# Altium PCB Klok.PcbDoc
Units mil, origin at the board's own origin, x right, y up, seen from the top; angles counter-clockwise.
Board outline 6761 x 3700 mil, 2 copper layers (Top Layer, Bottom Layer); 93 components, 127 nets, 420 pads, 96 vias.
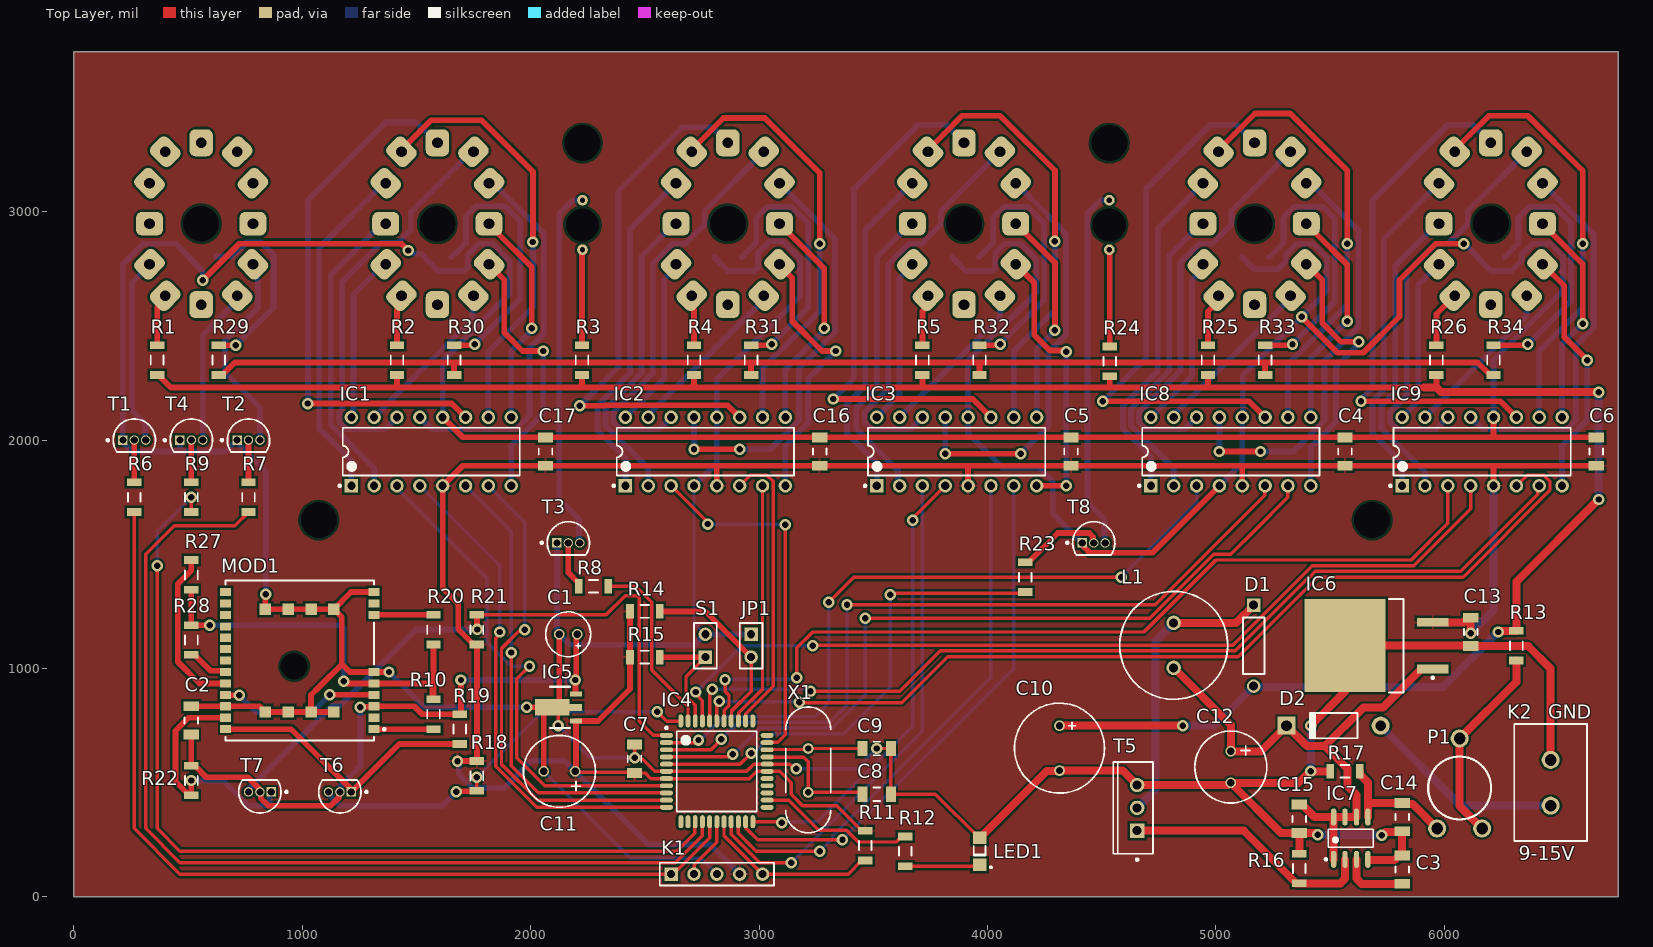
[diagram p0: Top Layer view]
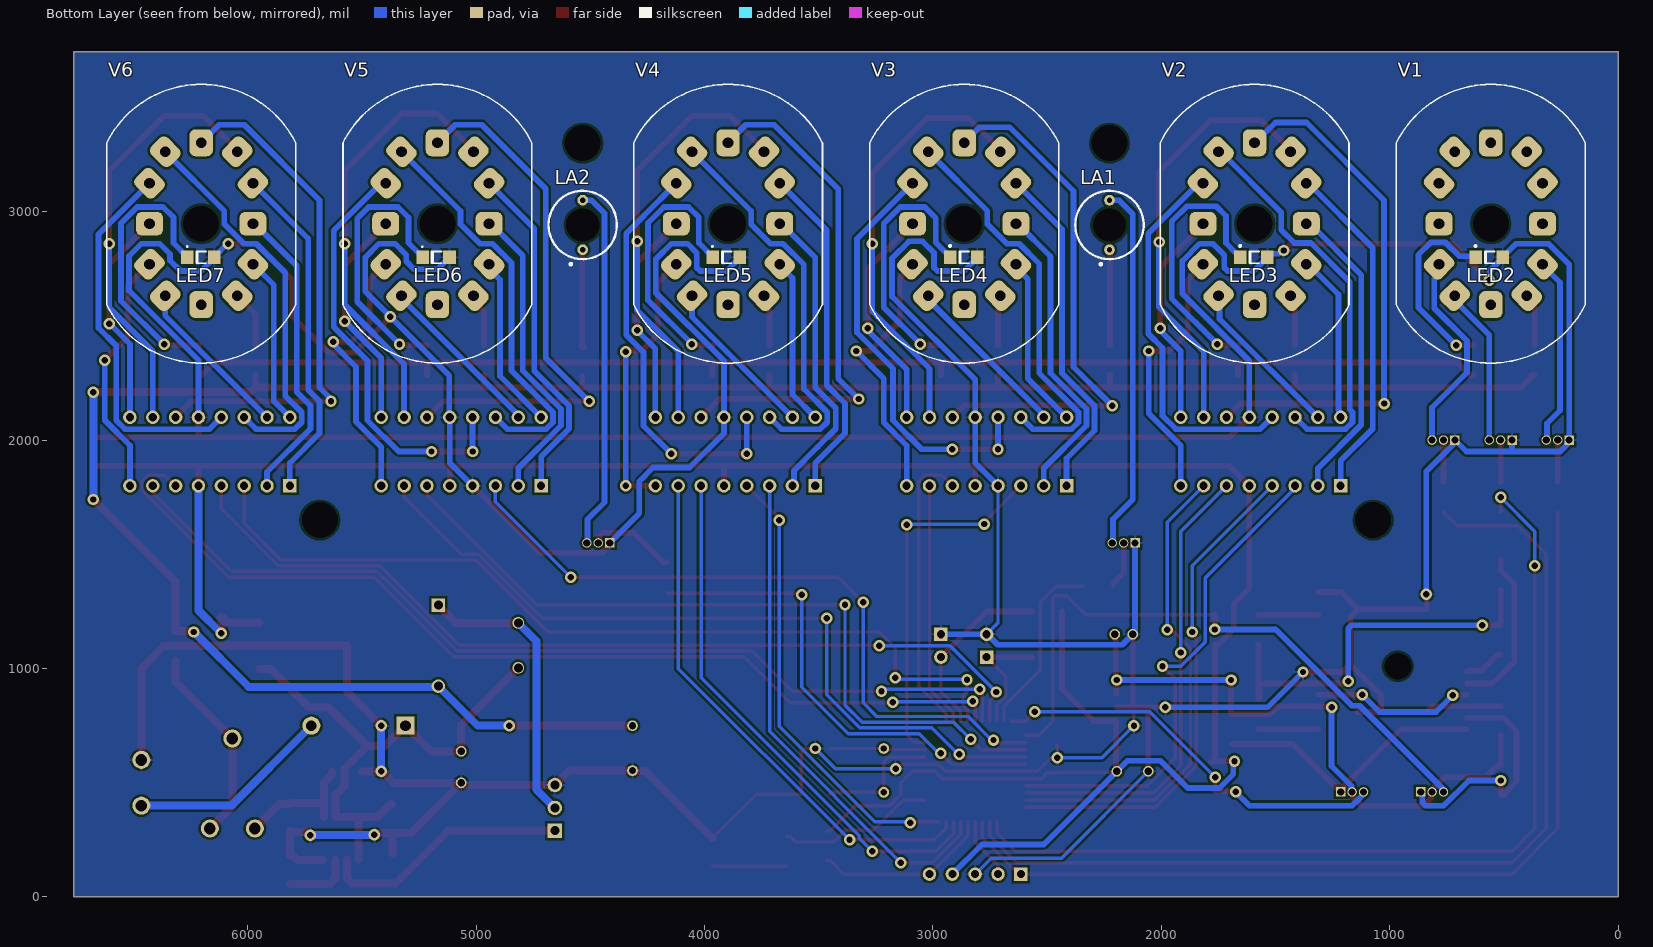
[diagram p1: Bottom Layer view, seen from below]

## Layer stack, top to bottom
Top Solder: solder mask 0.4, Solder Resist, Dk 3.5
Top Layer: signal copper 1.4
Dielectric 1: dielectric 12.6, FR-4, Dk 4.8
Bottom Layer: signal copper 1.4
Bottom Solder: solder mask 0.4, Solder Resist, Dk 3.5

## Board outline
0,0 6761,0 6761,3700 0,3700

## Design rules (kind name [scope] priority, off if disabled: settings)
Clearance [All] p1: gap=10 ignorepadtopadclearanceinfootprint=TRUE except(0: Arc-Hole Track-Hole SMDPad-Hole THPad-Hole Via-Hole Fill-Hole Poly-Hole Region-Hole Text-Hole)
HoleSize [All] p1: absolutevalues=TRUE maxlimit=200 minlimit=1 maxpercent=80.000 minpercent=20.000
MinimumSolderMaskSliver [All] p1: minsoldermaskwidth=0.5
PolygonConnect [All] p1: connectstyle=Relief reliefconductorwidth=10 reliefentries=4 polygonreliefangle="90 Angle" airgapwidth=10
RoutingVias [All] p1: holewidth=28 width=50 viastyle="Through Hole" minholewidth=28 minwidth=50 maxholewidth=28 maxwidth=50
SilkToSolderMaskClearance [IsPad] p1: minsilkscreentomaskgap=1 clearancetoexposedcopper=TRUE
SolderMaskExpansion [All] p1: expansion=4 istentingtop=FALSE
Width [All] p1: maxlimit=35 minlimit=15 preferedwidth=25 minimp=50.000000 maximp=50.000000 favimp=50.000000
27 further rules are at their usual default settings.

## Components (designator, comment, footprint, x,y, rotation, side; value= is the part's Value field where it differs from the comment)
C1 "Cap Pol1" ELCO2.2 2165,1150 r180 top value=2,2µF
C2 "Cap" 1206_Capacitor 515,772.87 r270 top value=100nF
C3 "Cap" 1206_Capacitor 5815,120 r270 top value=680pF
C4 "Cap" 1206_Capacitor 5565,1950 r270 top value=100nF
C5 "Cap" 1206_Capacitor 4365,1950 r270 top value=100nF
C6 "Cap" 1206_Capacitor 6665,1950 r270 top value=100nF
C7 "Cap" 1206_Capacitor 2455,605 r270 top value=100nF
C8 "Cap" 1206_Capacitor 3515,450 r180 top value=22pF
C9 "Cap" 1206_Capacitor 3515,650 r180 top value=22pF
C10 "Cap Pol1" ELCO10 4315,650 r270 top value=10µF
C11 "Cap Pol1" ELCO100 2195,550 r180 top value=1µF
C12 "Cap Pol1" ELCO100 5065,637.8 r270 top value=100µF
C13 "Cap" 1206_Capacitor 6115,1160 r90 top value=100nF
C14 "Cap" 1206_Capacitor 5815,350 r90 top value=100nF
C15 "Cap" 1206_Capacitor 5365,342.13 r90 top value=100nF
C16 "Cap" 1206_Capacitor 3265,1950 r270 top value=100nF
C17 "Cap" 1206_Capacitor 2065,1950 r270 top value=100nF
D1 "BYV26" Through_Hole 5165,1100 r270 top
D2 "1N4004" DO-41 5515,750 r180 top
IC1 "K155ID1" K155ID1 1565,1950 r90 top
IC2 "K155ID1" K155ID1 2765,1950 r90 top
IC3 "K155ID1" K155ID1 3865,1950 r90 top
IC4 "PIC18F4420" PIC18F4420 2815,550 r0 top
IC5 "AP2205-33Y-13" AP2205-33Y-13 2195,830 r90 top
IC6 "7805" 7805 5562.8,1100 r180 top
IC7 "MC34063" MC34063 5590,257.48 r90 top
IC8 "K155ID1" K155ID1 5065,1950 r90 top
IC9 "K155ID1" K155ID1 6165,1950 r90 top
JP1 "Header 2" HDR1X2 2965,1150 r270 top
K1 "Header 5" HDR1X5 2615,100 r0 top
K2 "Kroonsteen" KROONSTEEN 6465,600 r270 top
L1 "Inductor" Inductor 4815,1003.15 r90 top value=330µH
LA1 "Lamp Neon" Neon_Lamp 2227,3050 r270 bottom locked
LA2 "Lamp Neon" Neon_Lamp 4533,3050 r270 bottom locked
LED1 "LED0" 1206_LED 3965,200 r90 top
LED2 "LED0" 1206_LED 565,2800 r180 bottom
LED3 "LED0" 1206_LED 1595,2800 r180 bottom
LED4 "LED0" 1206_LED 2865,2800 r180 bottom
LED5 "LED0" 1206_LED 3905,2800 r180 bottom
LED6 "LED0" 1206_LED 5175,2800 r180 bottom
LED7 "LED0" 1206_LED 6205,2800 r180 bottom
MOD1 "A2235H" A2235H 963.82,1009.8 r180 top
P1 "RPot" Pot 5968.15,300 r0 top value=500K
R1 "Res2" 1206_Resistor 365,2350 r270 top value=27K
R2 "Res2" 1206_Resistor 1415,2350 r270 top value=27K
R3 "Res2" 1206_Resistor 2225,2350 r270 top value=470K
R4 "Res2" 1206_Resistor 2715,2350 r270 top value=27K
R5 "Res2" 1206_Resistor 3715,2350 r270 top value=27K
R6 "Res2" 1206_Resistor 265,1750 r90 top value=10K
R7 "Res2" 1206_Resistor 765,1750 r90 top value=10K
R8 "Res2" 1206_Resistor 2275,1360 r180 top value=3K3
R9 "Res2" 1206_Resistor 515,1750 r90 top value=10K
R10 "Res2" 1206_Resistor 1575,800 r90 top value=10K
R11 "Res2" 1206_Resistor 3465,225 r90 top value=10K
R12 "Res2" 1206_Resistor 3640,200 r90 top value=1K
R13 "Res2" 1206_Resistor 6315,1100 r90 top value=470K
R14 "Res2" 1206_Resistor 2500,1250 r0 top value=10K
R15 "Res2" 1206_Resistor 2500,1050 r0 top value=10K
R16 "Res2" 1206_Resistor 5365,125 r270 top value=150
R17 "Res2" 1206_Resistor 5565,550 r0 top value=5K6
R18 "Res2" 1206_Resistor 1765,530 r90 top value=10K
R19 "Res2" 1206_Resistor 1690,735 r90 top value=10K
R20 "Res2" 1206_Resistor 1575,1170 r270 top value=10K
R21 "Res2" 1206_Resistor 1765,1170 r270 top value=10K
R22 "Res2" 1206_Resistor 515,510 r90 top value=10K
R23 "Res2" 1206_Resistor 4165,1400 r90 top value=3K3
R24 "Res2" 1206_Resistor 4535,2345 r270 top value=470K
R25 "Res2" 1206_Resistor 4965,2350 r270 top value=27K
R26 "Res2" 1206_Resistor 5965,2350 r270 top value=27K
R27 "Res2" 1206_Resistor 515,1410 r270 top value=2,2K
R28 "Res2" 1206_Resistor 515,1125 r90 top value=2,2K
R29 "Res2" 1206_Resistor 635,2350 r90 top value=180
R30 "Res2" 1206_Resistor 1665,2350 r90 top value=180
R31 "Res2" 1206_Resistor 2965,2350 r90 top value=180
R32 "Res2" 1206_Resistor 3965,2350 r90 top value=180
R33 "Res2" 1206_Resistor 5215,2350 r90 top value=180
R34 "Res2" 1206_Resistor 6215,2350 r90 top value=180
S1 "Switch" HDR1X2 2765,1050 r90 top
T1 "MPSA42" MPSA42 265,2000 r0 top
T2 "MPSA42" MPSA42 765,2000 r0 top
T3 "MPSA42" MPSA42 2165,1550 r0 top
T4 "MPSA42" MPSA42 515,2000 r0 top
T5 "SPP20N60C3" SPP20N60C3 4655,390 r180 top
T6 "2N7000" 2N7000 1165,460 r180 top
T7 "2N7000" 2N7000 815,460 r180 top
T8 "MPSA42" MPSA42 4465,1550 r0 top
V1 "Nixie IN12" "Nixie IN12" 556,2950 r180 bottom locked
V2 "Nixie IN12" "Nixie IN12" 1590,2950 r180 bottom locked
V3 "Nixie IN12" "Nixie IN12" 2861,2950 r180 bottom locked
V4 "Nixie IN12" "Nixie IN12" 3895,2950 r180 bottom locked
V5 "Nixie IN12" "Nixie IN12" 5167,2950 r180 bottom locked
V6 "Nixie IN12" "Nixie IN12" 6201,2950 r180 bottom locked
X1 "22.1184MHz" "XTAL - duplicate" 3215,457.87 r90 top

## Footprints (in the part's own frame and the unit in brackets; to place one, negate y for a bottom-side part, rotate by r counter-clockwise, add the part's x,y. Pads: shape width x height; smd on the part's side, far side on the other; paste and mask are expansions set on the pad)
2N7000 [mm]
  rect 1.05x1.05 hole 0.8: 1(-1.27,0)
  round 1.05 hole 0.8: 2(0,0) 3(1.27,0)
  silkscreen extent -3.08,-1.34 2.35,2.35, body extent -2.35,-1.33 2.36,2.36, height 7.87
1206_Capacitor [mm]
  rect 1.1x1.7 smd: 1(-1.578,0) 2(1.578,0)
  silkscreen extent -0.35,-0.75 0.35,0.75, body extent -1.7,-0.9 1.7,0.9, height 1.52
1206_LED [mm]
  rect 1.4x1.5 smd: 1(-1.5,0) 2(1.5,0)
  silkscreen extent -0.5,-0.67 0.6,0.65, body extent -1.6,-0.8 1.6,0.8, height 0.68
1206_Resistor [mm]
  rect 0.85x1.6 smd: 1(-1.651,0) 2(1.651,0)
  silkscreen extent -0.5,-0.7 0.5,0.7, body extent -1.6,-0.85 1.6,0.85, height 0.65
7805 [mm]
  rect 3.5x0.95 smd: 1(-9.804,2.591) 3(-9.804,-2.591)
  rect 9x10.35 smd: 4(-0.056,0)
  silkscreen extent -9.93,-5.2 -4.96,5.2, body extent -6.56,-5.2 2.79,5.2, height 4.6
A2235H [mm]
  rect 1.2x0.9 smd: 1(-8.89,6.985) 2(-8.89,5.715) 3(-8.89,4.445) 4(-8.89,3.175) 5(-8.89,1.905) 6(-8.89,0.635) 7(-8.89,-5.715) 8(-8.89,-6.985) 9(-8.89,-8.255) 10(7.62,-8.255) 11(7.62,-6.985) 12(7.62,-5.715) 13(7.62,-4.445) 14(7.62,-3.175) 15(7.62,-1.905) 16(7.62,-0.635) 17(7.62,0.635) 18(7.62,1.905) 19(7.62,3.175) 20(7.62,4.445) 21(7.62,5.715) 22(7.62,6.985)
  rect 1.27x1.27 smd: 23(-4.445,5.08) 24(-1.905,5.08) 25(0.635,5.08) 26(3.175,5.08) 27(-4.445,-6.35) 28(-1.905,-6.35) 29(0.635,-6.35) 30(3.175,-6.35)
  round 2.7 hole 3 unplated: ""(-0.03,-0.005)
  silkscreen extent -10.16,-9.53 7.62,8.26, body extent -8.89,-9.52 7.62,8.25, height 7.11
AP2205-33Y-13 [mm]
  rect 0.55x1.3 smd: 1(-1.5,-0.088) 3(1.5,-0.088)
  rect 1.85x3.825 smd: 2(0,2.54)
  rect 0.8x1.475 smd: 2(0,0)
  silkscreen extent -2.3,0.6 2.3,2.8
DO-41 [mm] "Diode, Axial; Body 5.2 x 2.7 mm (LxDia. max), Lead Dia. 0.86 mm (max)"
  round 2 hole 1.2: 1(-5.23,0)
  rect 2x2 hole 1.2: 2(5.23,0)
  silkscreen extent -2.65,-1.4 2.75,1.4
ELCO2.2 [mm]
  round 1.2 hole 0.8: 1(-0.984,0) 2(1.016,0)
  silkscreen extent -2.48,-2.5 2.51,2.5
ELCO10 [mm]
  round 1.2 hole 0.8: 1(-2.54,0) 2(2.46,0)
  silkscreen extent -5.04,-5 4.96,5
ELCO100 [mm]
  round 1.2 hole 0.8: 1(0,0) 2(3.5,0)
  silkscreen extent -2.25,-4 5.75,4
HDR1X2 [mm] "Connector; Header; 2 Position"
  rect 1.5x1.5 hole 0.9: 1(0,0)
  round 1.5 hole 0.9: 2(2.54,0)
  silkscreen extent -1.27,-1.27 3.81,1.27
HDR1X5 [mm] "Connector; Header; 5 Position"
  rect 1.5x1.5 hole 0.9: 1(0,0)
  round 1.5 hole 0.9: 2(2.54,0) 3(5.08,0) 4(7.62,0) 5(10.16,0)
  silkscreen extent -1.27,-1.27 11.43,1.27
Inductor [mm]
  round 1.6 / inner round 1.2 / far side round 1.3 hole 1: 1(0,0) 2(5,0)
  silkscreen extent -3.5,-6 8.5,6
K155ID1 [mm]
  rect 1.5x1.5 hole 0.9: 1(-3.81,8.89)
  round 1.5 hole 0.9: 2(-3.81,6.35) 3(-3.81,3.81) 4(-3.81,1.27) 5(-3.81,-1.27) 6(-3.81,-3.81) 7(-3.81,-6.35) 8(-3.81,-8.89) 9(3.81,-8.89) 10(3.81,-6.35) 11(3.81,-3.81) 12(3.81,-1.27) 13(3.81,1.27) 14(3.81,3.81) 15(3.81,6.35) 16(3.81,8.89)
  silkscreen extent -3.93,-9.85 2.65,10.31, body extent -3.95,-9.85 3.95,9.85, height 5.08
KROONSTEEN [mm]
  round 2 / inner round 1.2 / far side round 2 hole 1.3: 1(0,0) 2(5.08,0)
  silkscreen extent -4,-4.05 9,4.05
MC34063 [mm]
  oval 1.9x0.6 smd: 1(-2.35,1.905) 2(-2.35,0.635) 3(-2.35,-0.635) 4(-2.35,-1.905) 5(2.35,-1.905) 6(2.35,-0.635) 7(2.35,0.635) 8(2.35,1.905)
  silkscreen extent -2.47,-2.5 1,2.88, body extent -2,-2.5 2,2.5, height 1.75
MPSA42 [mm]
  rect 1.05x1.05 hole 0.8: 1(-1.27,0)
  round 1.05 hole 0.8: 2(0,0) 3(1.27,0)
  silkscreen extent -3.07,-1.34 2.35,2.35, body extent -2.35,-1.33 2.36,2.36, height 7.87
Neon_Lamp [mm]
  round 1.2 hole 0.6: 1(0,0) 2(5.5,0)
  round 1.524 hole 3.7: 3(2.75,0)
  silkscreen extent -1.05,-3.8 6.55,3.8
"Nixie IN12" [mm]
  rrect50% 0x0 hole 4 unplated: 0(-0.05,-0.075)
  rrect50% 2.6x3 hole 1.2 rot 45: 1(3.95,-8.075) 2(5.7,-4.575) 7(-4.05,7.925) 8(-5.8,4.425)
  rrect50% 3x2.6 hole 1.2: 3(5.7,-0.075) 9(-5.8,-0.075)
  rrect50% 2.6x3 hole 1.2 rot 135: 4(5.7,4.425) 5(3.95,7.925) 10(-5.8,-4.575) 11(-4.05,-8.075)
  rrect50% 2.6x3 hole 1.2: 6(-0.05,8.925) 12(-0.05,-9.075)
  silkscreen extent -10.55,-15.58 10.45,15.42
PIC18F4420 [mm]
  oval 1.45x0.55 smd: 1(-5.6,4) 2(-5.6,3.2) 3(-5.6,2.4) 4(-5.6,1.6) 5(-5.6,0.8) 6(-5.6,0) 7(-5.6,-0.8) 8(-5.6,-1.6) 9(-5.6,-2.4) 10(-5.6,-3.2) 11(-5.6,-4) 23(5.6,-4) 24(5.6,-3.2) 25(5.6,-2.4) 26(5.6,-1.6) 27(5.6,-0.8) 28(5.6,0) 29(5.6,0.8) 30(5.6,1.6) 31(5.6,2.4) 32(5.6,3.2) 33(5.6,4)
  oval 0.55x1.45 smd: 12(-4,-5.6) 13(-3.2,-5.6) 14(-2.4,-5.6) 15(-1.6,-5.6) 16(-0.8,-5.6) 17(0,-5.6) 18(0.8,-5.6) 19(1.6,-5.6) 20(2.4,-5.6) 21(3.2,-5.6) 22(4,-5.6) 34(4,5.6) 35(3.2,5.6) 36(2.4,5.6) 37(1.6,5.6) 38(0.8,5.6) 39(0,5.6) 40(-0.8,5.6) 41(-1.6,5.6) 42(-2.4,5.6) 43(-3.2,5.6) 44(-4,5.6)
  silkscreen extent -5.72,-4.45 4.45,4.95, body extent -5,-5 5,5, height 1.2
Pot [mm]
  round 2 / inner round 1.2 / far side round 2 hole 1.3: 1(2.5,10) 2(0,0) 3(5,0)
  silkscreen extent -1,1 6,8
SPP20N60C3 [mm]
  rect 1.6x1.6 hole 1: 1(0,2.54)
  round 1.6 hole 1: 2(0,0) 3(0,-2.54)
  silkscreen extent -1.75,-5.1 2.65,5.87, body extent -1.75,-5.1 2.65,5.1, height 20.7
Through_Hole [mm]
  rect 1.5x1.5 hole 1: 1(-4.5,0)
  round 1.5 hole 1: 2(4.5,0)
  silkscreen extent -3.15,-1.2 3.15,1.2, body extent -3.15,-1.2 3.15,1.2, height 2.4
"XTAL - duplicate" [mm]
  round 1.2 hole 0.7: 1(0,0) 2(4.88,0)
  silkscreen extent -4.5,-2.5 9.5,2.5

## Part data
C1 C10 C11 C12: "Polarized Capacitor (Radial)", LatestRevisionDate=17-Jul-2002, LatestRevisionNote="Re-released for DXP Platform.", PackageDescription="Polarized Capacitor (Radial); 2 Leads", PackageReference=RB7.6-15, Published=8-Jun-2000, Publisher="Altium Limited"
C2 C3 C4 C5 C6 C7 C8 C9 C13 C14 C15 C16 C17: "Capacitor", LatestRevisionDate=17-Jul-2002, LatestRevisionNote="Re-released for DXP Platform.", PackageDescription="Radial Cap, Thru-Hole; 2 Leads; 0.3 in Pin Spacing", PackageReference=RAD-0.3, Published=8-Jun-2000, Publisher="Altium Limited"
D2: library part "Diode 1N4004", "1 Amp General Purpose Rectifier", Code_JEDEC=DO-204-AL, ComponentLink1Description="Manufacturer Link", ComponentLink1URL=http://www.fairchildsemi.com/, ComponentLink2Description=Datasheet, ComponentLink2URL=http://www.fairchildsemi.com/ds/1N%2F1N4001.pdf, DatasheetVersion=1998, LatestRevisionDate=17-Jul-2002, LatestRevisionNote="Re-released for DXP Platform.", PackageDescription="Diode, Axial; Body 5.2 x 2.7 mm (LxDia. max), Lead Dia. 0.86 mm (max)", PackageReference=DO-41, PackageVersion=Aug-1999, Published=8-Jun-2000, Publisher="Altium Limited"
JP1: "Header, 2-Pin", LatestRevisionDate=17-Jul-2002, LatestRevisionNote="Re-released for DXP Platform.", Publisher="Altium Limited"
K1: "Header, 5-Pin", LatestRevisionDate=17-Jul-2002, LatestRevisionNote="Re-released for DXP Platform.", Publisher="Altium Limited"
K2 S1: library part "Header 2", "Header, 2-Pin", LatestRevisionDate=17-Jul-2002, LatestRevisionNote="Re-released for DXP Platform.", Publisher="Altium Limited"
LA1 LA2: "Neon Lamp", LatestRevisionDate=17-Jul-2002, LatestRevisionNote="Re-released for DXP Platform.", PackageReference=PIN2, Published=24-Mar-1999, Publisher="Altium Limited"
LED1 LED2 LED3 LED4 LED5 LED6 LED7: "Typical INFRARED GaAs LED", LatestRevisionDate=08-Jul-2005, LatestRevisionNote="Mech Layer 1 removed.", PackageDescription="LED; 2 Leads", PackageReference=LED-0, Published=8-Jun-2000, Publisher="Altium Limited"
P1: "Potentiometer", LatestRevisionDate=17-Jul-2002, LatestRevisionNote="Re-released for DXP Platform.", PackageDescription="Variable Resistor, Thru-Hole; 3 Leads", PackageReference=VR5, Published=8-Jun-2000, Publisher="Altium Limited", Set Position=0.5, Sim Note="Enter the Resistance value and the set point into parameter fields."
R1 R2 R3 R4 R5 R6 R7 R8 R9 R10 R11 R12 R13 R14 R15 R16 R17 R18 R19 R20 R21 R22 R23 R24 R25 R26 R27 R28 R29 R30 R31 R32 R33 R34: "Resistor", LatestRevisionDate=17-Jul-2002, LatestRevisionNote="Re-released for DXP Platform.", PackageDescription="Axial Device, Thru-Hole; 2 Leads; 0.4 in Pin Spacing", PackageReference=AXIAL-0.4, Published=8-Jun-2000, Publisher="Altium Limited"
X1: library part XTAL, "Crystal Oscillator", LatestRevisionDate=17-Jul-2002, LatestRevisionNote="Re-released for DXP Platform.", PackageDescription="Crystal, Thru-Hole; 2 Leads; Body 3.1 x 8.2 mm (Dia.xH)", PackageReference=R38, Published=8-Jun-2000, Publisher="Altium Limited"
L1: Code_IEC=1005, Code_JEITA=0402, LatestRevisionDate=29-May-2009, LatestRevisionNote="IPC-7351 Footprint Added.", PackageDescription="Chip Inductor", PackageReference=0402-A, Published=8-Jun-2000, Publisher="Altium Limited"

## Free pads (board coordinates)
  round 60 hole 157.48 unplated: 4(1073,1650) 4(2227,3300) 4(4533,3300) 4(5684,1650)

## Via types
v1: diameter 50, hole 28, Top Layer to Bottom Layer, 96 vias

## Nets (pads, with @x,y where several pads share a name; then routed paths per layer and width w, separated by ;. In a path a pad name is that pad's centre, name@x,y a point inside that pad or via, vN(x,y) a via of type N, cw(c..) or ccw(c..) an arc to the next point about the centre after c; other vN are vias at no path point)
+1.8V: MOD1.5 R10.2 R20.2 R27.2 R28.2 | length 1754.3
  Top Layer w25: R27.2 R28.2 v1(595,1190) ; v1(1182.47,944.64) 1189.23,944.64 1199.07,934.8 MOD1.5 ; MOD1.5@1319.72,934.8 1565.2,934.8 1570,930 1570,869.23 1574.23,865 R10.2 R20.2
  Bottom Layer w25: v1(595,1190) 1167.57,1190 1182.22,1175.36 1182.22,944.89 v1(1182.47,944.64)
+3,3V: C1.1 C2.2 IC5.3 MOD1.3 R19.2 R22.2 T6.2 T7.2 | length 2691.6
  Top Layer w25: C2.2 R22.2 529.76,575 580.44,524.32 761.73,524.32 811.87,474.18 811.87,463.13 818.13,456.87 818.13,433.72 851.84,400 1125,400 1161.87,436.87 1161.87,456.87 T6.2 ; v1(1255,830) 1257.4,832.4 1311.42,832.4 MOD1.3 1490.46,834.8 1525.27,800 R19.2 1695,805 v1(1695,950) ; IC5.3 2196.72,890.73 2196.72,948.28 v1(2195,950) 2199.48,954.48 2199.48,1145.74 C1.1
  Bottom Layer w25: T6.2 1168.13,463.13 1168.13,486.28 1255,573.16 v1(1255,830) ; v1(1695,950) v1(2195,950)
+3.3V: R29.1 R30.1 R31.1 R32.1 R33.1 R34.1 | length 5845.6
  Top Layer w25: R29.1 649.76,2285 704.76,2340 1665,2340 ; R30.1 1665,2340 ; R31.1 2965,2340 ; R32.1 3965,2340 ; R33.1 5215,2340 ; R34.1 6200.24,2285 6145.24,2340 5215,2340 ; 1665,2340 2965,2340 ; 2965,2340 3965,2340 ; 3965,2340 5215,2340
+5V: C4.2 C5.2 C6.2 C7.2 C11.1 C13.2 C16.2 C17.2 IC1.5 IC2.5 IC3.5 IC4.7 IC4.28 IC5.1 IC6.3 IC8.5 IC9.5 K1.4 R11.2 R14.1 R15.1 R18.2 R21.2 | length 11606.5
  Top Layer w15: C11.1 2198.56,546.44 2451.44,546.44 C7.2@2455.05,542.82 ; C7.2 C7.2@2455.05,542.82 ; IC4.7 2526.5,518.5 2502.18,542.82 C7.2@2455.05,542.82 ; IC4.7@2595.8,517.23 2957.23,517.23 2990,550 IC4.28 3090,550 3140,500 3140,450 3190,400 3340.24,400 3450.24,290 R11.2
  Top Layer w25: v1(1680,595) R18.2 R21.2 1750.24,1105 1683.76,1171.48 1683.76,1281.24 1615,1350 IC1.5 1702.87,1887.87 C17.2 2815,1887.87 ; R18.2@1770,595 1774.23,590.77 R18.2@1784,590.77 ; C11.1@2198.44,550 IC5.1 2199.39,770 2295,770 2435,910 R15.1 R14.1 ; IC2.5 2815,1887.87 ; IC3.5 3915,1887.87 ; IC8.5 5115,1887.87 ; IC9.5 6215,1887.87 ; C6.2 6215,1887.87 ; 2815,1887.87 C16.2 3915,1887.87 ; 3915,1887.87 C5.2 5115,1887.87 ; 5115,1887.87 C4.2 6215,1887.87
  Top Layer w35: IC6.3 6083.06,1202 6103.19,1222.13 C13.2 v1(6115,1154.53) ; C13.2@6115,1226.28 C13.2@6119.15,1222.13
  Bottom Layer w25: v1(1680,595) 1684.78,590.22 1684.78,538.04 1745.32,477.5 1884.78,477.5 2003.4,596.12 2148.88,596.12 C11.1 2515,230 2785,230 K1.4
  Bottom Layer w35: v1(6115,1154.53) 6215,1254.53 IC9.5
+180V: C10.1 D1.2 R1.2 R2.2 R3.2 R4.2 R5.2 R13.2 R24.2 R25.2 R26.2 | length 10105.3
  Top Layer w25: R1.2 379.76,2285 384,2280.77 384,2271 425,2230 1415,2230 ; R2.2 1415,2230 ; R3.2 2225,2230 ; R4.2 2715,2230 ; R5.2 3715,2230 ; R24.2 4535,2230 ; R25.2 4965,2240 4975,2230 ; 5911.36,2230 4975,2230 ; 5965,2230 R26.2 ; 1415,2230 2225,2230 ; 2225,2230 2715,2230 ; 2715,2230 3715,2230 ; 3715,2230 4535,2230 ; 4535,2230 4965,2230 4975,2230
  Top Layer w35: C10.1 v1(4855,750) ; D1.2 5167.83,920 D1.2@5169.25,921.42 ; 5911.36,2230 5965,2230 5985,2210 v1(6675,2210) ; v1(6235,1160) 6239.06,1160 6244.06,1165 R13.2 6315,1380 v1(6675,1740)
  Bottom Layer w35: v1(4855,750) 4992.17,750 D1.2 5167.83,920 5995,920 v1(6235,1160) ; v1(6675,1740) v1(6675,2210)
GND: C1.2 C2.1 C3.1 C4.1 C5.1 C6.1 C7.1 C8.1 C9.1 C10.2 C11.2 C12.2 C13.1 C14.1 C15.1 C16.1 C17.1 IC1.12 IC2.4 IC2.12 IC3.12 IC4.6 IC4.29 IC5.2 IC6.4 IC7.4 IC8.4 IC8.12 IC9.12 JP1.1 K1.3 K2.1 LED1.2 LED2.2 LED3.2 LED4.2 LED5.2 LED6.2 LED7.2 MOD1.6 MOD1.9 MOD1.20 MOD1.23 MOD1.24 MOD1.25 MOD1.26 MOD1.27 MOD1.28 MOD1.29 MOD1.30 R16.1 R17.1 S1.2 T1.1 T2.1 T3.1 T4.1 T5.3 T8.1 | length 32496
  Top Layer w15: v1(2120,750) IC5.2@2120,830 ; C7.1 v1(2455,610) 2461.7,603.3 2490.18,603.3 2543.48,550 IC4.6 2945,550 2976.5,581.5 3133.5,581.5 3146.76,568.24 3156.86,568.24 v1(3163.56,561.55) ; v1(3514.95,650.05) 3515,650 C9.1 C8.1 3772.09,450 3963.03,259.06 LED1.2
  Top Layer w25: C2.1 515.1,834.9 663.72,834.9 663.82,835 813.62,835 MOD1.26 MOD1.25 MOD1.24 ; v1(565,2700) 724.73,2859.73 1435.27,2859.73 v1(1465,2830) ; v1(840,1325) 838.82,1323.82 MOD1.30 MOD1.29 MOD1.28 MOD1.27 ; MOD1.23 MOD1.24 ; MOD1.9 1213.82,1334.8 MOD1.27 ; v1(1380.2,984.8) MOD1.6 1207.83,984.8 1173.82,1018.82 ; IC1.12 1702.87,2012.13 C17.1 C16.1 C5.1 C4.1 6215,2012.13 ; v1(1982.5,830) IC5.2@2055,830 ; C11.2 2057.2,822.03 2060.65,825.47 2056.12,830 2095,830 2115,830 2125,840 C1.2 ; IC5.2@2120,830 IC5.2@2195,830 ; T8.1 4421.83,1543.17 4421.83,1532.12 4447.12,1506.83 4721.83,1506.83 IC8.4 ; v1(5375,2540) 5532.5,2382.5 5644.68,2382.5 5803.46,2541.28 5803.46,2700.95 5962.51,2860 v1(6085,2860) ; IC9.12 6215,2012.13 ; C6.1 6215,2012.13 ; MOD1.24 1038.82,883.82 1075,920 1173.82,1018.82 ; MOD1.27 1173.82,1224.8 1173.82,1018.82
  Top Layer w35: LED1.2 3966.97,259.06 4258.72,550.81 4312.66,550.81 C10.2 4591.85,553.15 T5.3 5051.69,490 5061.69,500 C12.2 ; R16.1 C15.1 ; v1(5415,750) 5565,900 IC6.4 6112.87,1100 C13.1 6367.13,1097.87 6465,1000 K2.1 ; v1(5445,272.13) 5437.13,280 C15.1 ; R17.1 v1(5415,550) 5410.94,550 5360.94,500 C12.2 ; IC7.4@5670.69,161.29 5782.35,161.29 5803.19,182.13 C3.1 C14.1 5810.85,283.72 5742.78,283.72 5729.06,270 v1(5725,270) ; C12.2 5285,280 C15.1
  Bottom Layer w15: C11.2 2437.2,170 2745,170 K1.3 ; v1(2120,750) 2260,610 v1(2455,610) ; IC2.4 2715,1200 S1.2 ; v1(3163.56,561.55) 3426.44,561.55 v1(3514.95,650.05)
  Bottom Layer w25: T4.1 465,1955.53 459.47,1950 ; v1(565,2700) 565,2738.98 505.94,2798.03 LED2.2 505.94,2801.97 448.18,2859.73 304.73,2859.73 215,2770 T1.1 221.83,1993.17 221.83,1982.12 253.95,1950 459.47,1950 ; v1(840,1325) 840,1863.95 721.83,1982.12 721.83,1993.17 T2.1 665,1950 459.47,1950 ; v1(1380.2,984.8) 1535,830 v1(1982.5,830) ; v1(1465,2830) 1471.76,2830 1485.45,2816.32 1520.89,2816.32 1535.94,2801.26 LED3.2 1595.94,2740 1710.36,2740 1725,2754.64 1725,2810 1775,2860 1832.43,2860 1908.2,2784.23 1908.2,2640.37 1615,2347.18 IC1.12 ; T3.1 2115,1166.02 2125,1156.02 C1.2 2171.12,1103.88 2716.33,1103.88 2762.45,1150 S1.2 JP1.1 ; IC2.4 2815,1900 IC2.12 2815,2264.63 3179.2,2628.82 3179.2,2795.8 3105,2870 3045,2870 2995,2820 2995,2754.64 2980.36,2740 2863.98,2740 2805.94,2798.03 LED4.2 ; LED5.2 3845.94,2798.03 3903.98,2740 4018.85,2740 4033.5,2754.64 4033.5,2818.5 4075,2860 4145,2860 4213.2,2791.8 4213.2,2645.37 3915,2347.18 IC3.12 3915,2030 4065,1880 4225,1880 4285,1820 4285,1680 T8.1 ; IC8.4 5115,1900 IC8.12 5117.4,2102.4 5117.4,2282.4 v1(5375,2540) 5485.2,2650.2 5485.2,2799.8 5425,2860 5355,2860 5305.5,2810.5 5305.5,2782.54 5270.93,2747.97 5197.18,2747.97 ; LED6.2 5115.94,2798.03 5131,2782.97 5132.97,2782.97 5167.94,2748.01 5197.14,2748.01 ; v1(6085,2860) 6087.91,2860 6145.94,2801.97 LED7.2 6145.94,2798.03 6203.98,2740 6292.96,2740 6339.5,2786.54 6339.5,2814.5 6385,2860 6465,2860 6519.2,2805.8 6519.2,2654.2 6215,2350 IC9.12
  Bottom Layer w35: v1(5415,550) v1(5415,750) ; v1(5445,272.13) 5446.06,271.06 5723.94,271.06 v1(5725,270)
NetC3_2: C3.2 IC7.3 | length 293.8
  Top Layer w35: IC7.3 5615,80.5 5637.63,57.87 C3.2
NetC8_2: C8.2 IC4.30 X1.1 | length 563.4
  Top Layer w15: IC4.30 3036.75,611.72 3195.13,611.72 3215,591.84 X1.1 3445,457.87 C8.2
NetC9_2: C9.2 IC4.31 X1.2 | length 419.7
  Top Layer w15: IC4.31 3036.75,645.76 3210.76,645.76 X1.2 C9.2
NetC12_1: C12.1 C15.2 D2.2 IC6.1 IC7.1 IC7.6 IC7.7 IC7.8 L1.1 | length 2399.2
  Top Layer w35: L1.1 5065,753.15 C12.1 5196.89,637.8 D2.2 5398.59,660.51 5476.61,660.51 ; C15.2 5376.81,404.25 5431.06,350 IC7.7 IC7.6 5615,446.01 5575,486.01 5575,562.12 5476.61,660.51 ; IC7.1 IC7.8@5515,347.82 ; IC6.1 5898.6,998 5730.6,830 5646.1,830 5476.61,660.51
NetC14_2: C14.2 IC7.5 P1.2 R17.2 | length 565
  Top Layer w35: R17.2 5630,536.77 5665,501.77 5665,410 ; IC7.5 5665,410 ; P1.2 5860.18,407.97 5819.15,407.97 C14.2 5667.13,412.13 5665,410
NetD1_1: D1.1 L1.2 T5.2 | length 1258.2
  Top Layer w35: L1.2 5087.83,1200 D1.1
  Bottom Layer w35: T5.2 4736.13,471.13 4736.13,1121.13 L1.2
NetD2_1: D2.1 K2.2 | length 889.1
  Bottom Layer w35: D2.1 6070.91,400 K2.2
NetIC1_1: IC1.1 V2.4 | length 1503.2
  Bottom Layer w25: IC1.1 1215,1910 1075,2050 1075,2842.17 V2.4@1360,3127.17
NetIC1_2: IC1.2 V2.3 | length 1330.7
  Bottom Layer w25: IC1.2 1315,1876.92 1125,2066.92 1125,2722.87 1352.13,2950 V2.3@1360,2950
NetIC1_3: IC1.3 IC4.8 | length 2206
  Top Layer w15: v1(1995,1010) 1940,955 1940,609.05 2062.04,487.01 IC4.8
  Bottom Layer w15: IC1.3 1415,1790 1808.59,1396.41 1808.59,1116.31 1914.9,1010 v1(1995,1010)
NetIC1_4: IC1.4 IC4.11 | length 2201.9
  Top Layer w15: v1(1864.95,1160.05) 1864.95,1150.58 1847.5,1133.13 1847.5,571.43 2026.41,392.52 IC4.11
  Bottom Layer w15: IC1.4 1864.95,1450.05 v1(1864.95,1160.05)
NetIC1_6: IC1.6 IC4.9 | length 2037.1
  Top Layer w15: v1(1915,1070) 1915,574.64 2034.13,455.51 IC4.9
  Bottom Layer w15: IC1.6 1915,1600 v1(1915,1070)
NetIC1_7: IC1.7 IC4.10 | length 2126.1
  Top Layer w15: v1(1975,1170) 1968.3,1163.3 1948.2,1163.3 1872.5,1087.6 1872.5,581.79 2030.27,424.02 IC4.10
  Bottom Layer w15: IC1.7 1975,1640 v1(1975,1170)
NetIC1_8: IC1.8 V2.10 | length 1183.9
  Top Layer w25: V2.10@1812.76,2772.83 1885,2700.59 1885,2470 1965,2390 v1(2055,2390)
  Bottom Layer w25: IC1.8 1915,1976.92 2055,2116.92 v1(2055,2390)
NetIC1_9: IC1.9 V2.9 | length 967.4
  Top Layer w25: V2.9@1812.76,2950 1813.55,2950 1851.23,2912.32 1851.23,2911.53 2005,2757.76 v1(2005,2490)
  Bottom Layer w25: IC1.9 1915,2390 2005,2480 v1(2005,2490)
NetIC1_10: IC1.10 V2.5 | length 1886.2
  Top Layer w25: V2.5@1428.9,3264.96 1518.29,3354.35 1518.29,3354.76 1546.46,3382.93 1546.87,3382.93 1563.94,3400 1785,3400 2010,3175 v1(2010,2867)
  Bottom Layer w25: IC1.10 1815,2387.23 2010,2582.23 v1(2010,2867)
NetIC1_11: IC1.11 V2.6 | length 2343
  Top Layer w25: v1(1025,2160) 1655,2160 IC1.11
  Bottom Layer w25: v1(1025,2160) 1025,3050 1365,3390 1500.71,3390 1547.9,3342.8 1548.69,3342.8 1586.38,3305.12 V2.6@1586.38,3304.33
NetIC1_13: IC1.13 V2.8 | length 1679.6
  Bottom Layer w25: IC1.13 1567.03,2047.97 1936.55,2047.97 1995,2106.42 1995,2402.82 2057.5,2465.32 2057.5,2904 1995,2966.5 1837.28,3124.21 V2.8
NetIC1_14: IC1.14 V2.7 | length 1755.5
  Bottom Layer w25: IC1.14 1362.97,2047.97 1193.45,2047.97 1162.97,2078.45 1162.97,2121.55 1175,2133.58 1175,2692.04 1345.65,2862.68 1417.68,2862.68 1475,2920 1475,2996.1 V2.7@1743.86,3264.96
NetIC1_15: IC1.15 V2.11 | length 713.8
  Bottom Layer w25: IC1.15 1745.19,2530.19 1745.19,2633.71 V2.11@1743.86,2635.04
NetIC1_16: IC1.16 V2.2 | length 732.9
  Bottom Layer w25: IC1.16 1221.52,2106.52 1221.52,2128.19 1225,2131.67 1225,2637.83 V2.2@1360,2772.83
NetIC2_1: IC2.1 V3.4 | length 1517.1
  Bottom Layer w25: IC2.1 2415,1920 2292.97,2042.03 2292.97,2150.55 2435,2292.57 2435,2922.62 V3.4
NetIC2_2: IC2.2 V3.3 | length 1357
  Bottom Layer w25: IC2.2 2515,1876.92 2327.97,2063.95 2327.97,2136.05 2485,2293.08 2485,2803.33 2628.72,2947.05 V3.3
NetIC2_3: IC2.3 IC4.32 | length 1588.4
  Top Layer w15: IC2.3 2775,1640 v1(2775,1632.5) ; IC4.32 3036.75,677.26 3082.26,677.26 3115,710 v1(3115,1630)
  Bottom Layer w15: v1(2775,1632.5) 2776.25,1631.25 3113.75,1631.25 v1(3115,1630)
NetIC2_6: IC2.6 IC4.35 | length 1277.1
  Top Layer w15: IC2.6 2962.03,1847.03 3034.48,1847.03 3062.03,1819.48 3062.03,921.67 2942.26,801.9 2942.26,771.75 IC4.35
NetIC2_7: IC2.7 IC4.36 | length 1073.2
  Top Layer w15: IC4.36 2910.76,771.75 2910.76,805.76 3015,910 IC2.7
NetIC2_8: IC2.8 V3.10 | length 1197.9
  Top Layer w25: V3.10 3089.35,2765.35 3145,2709.7 3145,2520 3275,2390 v1(3335,2390)
  Bottom Layer w25: IC2.8 3115,1976.92 3215,2076.92 3215,2270 v1(3335,2390)
NetIC2_9: IC2.9 V3.9 | length 999
  Top Layer w25: V3.9 3090.14,2947.05 3127.82,2909.36 3127.82,2908.57 3285,2751.39 v1(3285,2490)
  Bottom Layer w25: IC2.9 3115,2310 3285,2480 v1(3285,2490)
NetIC2_10: IC2.10 V3.5 | length 1899
  Top Layer w25: V3.5 2705.49,3270.49 2774.8,3339.8 2774.8,3340.27 2844.53,3410 3025,3410 3265,3170 v1(3265,2860)
  Bottom Layer w25: IC2.10 3015,2312.82 3265,2562.82 v1(3265,2860)
NetIC2_11: IC2.11 V3.6 | length 2355.6
  Top Layer w25: v1(2215,2150) 2325,2150 2327.03,2152.03 2862.97,2152.03 IC2.11
  Bottom Layer w25: v1(2215,2150) 2385,2320 2385,3090 2665,3370 2795.14,3370 2862.97,3302.17 V3.6
NetIC2_13: IC2.13 V3.8 | length 1856.1
  Top Layer w25: v1(2715,1960) v1(2915,1960)
  Bottom Layer w25: v1(2715,1960) IC2.13 ; v1(2915,1960) 3048.58,1960 3175,2086.42 3175,2312.82 3332.5,2470.32 3332.5,2881.06 V3.8
NetIC2_14: IC2.14 V3.7 | length 1773.8
  Bottom Layer w25: IC2.14 2562.97,2047.97 2393.45,2047.97 2362.97,2078.45 2362.97,2121.55 2535,2293.58 2535,2772.49 2622.24,2859.73 2676.34,2859.73 2761.73,2945.12 2761.73,3003.29 V3.7
NetIC2_15: IC2.15 V3.11 | length 741.5
  Bottom Layer w25: IC2.15 2515,2109.22 3020.45,2614.66 V3.11
NetIC2_16: IC2.16 V3.2 | length 761.7
  Bottom Layer w25: IC2.16 2585,2270 2585,2705.63 2636.59,2757.22 V3.2
NetIC3_1: IC3.1 V4.4 | length 1496.4
  Bottom Layer w25: IC3.1 3515,1900 3385,2030 3385,2160 3465,2240 3465,2918.62 V4.4
NetIC3_2: IC3.2 V4.3 | length 1332.1
  Bottom Layer w25: IC3.2 3608.48,1806.52 3608.48,1865.73 3505,1969.22 3505,1970 3425,2050 3425,2140 3515,2230 3515,2799.33 3662.72,2947.05 V4.3
NetIC3_3: IC3.3 IC4.19 | length 2256.7
  Top Layer w15: IC4.19 2877.99,274.62 3002.62,150 v1(3140,150)
  Bottom Layer w15: v1(3140,150) 3715,725 IC3.3
NetIC3_4: IC3.4 IC4.22 | length 1988.5
  Top Layer w15: IC4.22 3094.53,329.53 3099.11,324.95 v1(3100.05,324.95) ; v1(3672.5,1650) 3672.5,1657.5 IC3.4
  Bottom Layer w15: v1(3100.05,324.95) 3105.1,330 3255,330 3672.5,747.5 v1(3672.5,1650)
NetIC3_6: IC3.6 IC4.20 | length 2349.7
  Top Layer w15: IC4.20 2909.49,278.48 2987.97,200 v1(3265,200)
  Bottom Layer w15: v1(3265,200) 3322.5,257.5 3322.5,267.6 4015,960.1 IC3.6
NetIC3_7: IC3.7 IC4.21 | length 2333
  Top Layer w15: IC4.21 2942.26,328.25 2942.26,301.97 2994.23,250 v1(3365,250)
  Bottom Layer w15: v1(3365,250) 4115,1000 IC3.7
NetIC3_8: IC3.8 V4.10 | length 1231.2
  Top Layer w25: V4.10 4204.62,2688.6 4204.62,2460.38 4272.72,2392.28 4340.22,2392.28 v1(4345,2387.5) ; IC3.8 v1(4345,1800)
  Bottom Layer w25: v1(4345,1800) v1(4345,2387.5)
NetIC3_9: IC3.9 V4.9 | length 951.7
  Top Layer w25: V4.9 4124.14,2947.05 4295,2776.18 v1(4295,2480)
  Bottom Layer w25: IC3.9 4215,2400 v1(4295,2480)
NetIC3_10: IC3.10 V4.5 | length 1880.2
  Top Layer w25: V4.5 3739.49,3270.96 3808.8,3340.27 3888.53,3420 4055,3420 4295,3180 v1(4295,2870)
  Bottom Layer w25: IC3.10 4115,2389.61 4295,2569.61 v1(4295,2870)
NetIC3_11: IC3.11 V4.6 | length 2311.4
  Top Layer w25: v1(3325,2180) 3935,2180 IC3.11
  Bottom Layer w25: v1(3325,2180) 3415,2270 3415,3100 3695,3380 3819.14,3380 3896.97,3302.17 V4.6
NetIC3_13: IC3.13 V4.8 | length 1846.8
  Top Layer w25: v1(3815,1940) v1(4145,1940)
  Bottom Layer w25: v1(3815,1940) IC3.13 ; V4.8 4267.03,2980.53 4267.03,2979.93 4342.5,2904.46 4342.5,2460.32 4267.03,2384.85 4267.03,2062.03 v1(4145,1940)
NetIC3_14: IC3.14 V4.7 | length 1746.4
  Bottom Layer w25: IC3.14 3662.97,2047.97 3493.45,2047.97 3462.97,2078.45 3462.97,2121.55 3565,2223.58 3565,2768.49 3656.24,2859.73 3710.34,2859.73 3795.73,2945.12 3795.73,3003.29 V4.7
NetIC3_15: IC3.15 V4.11 | length 714.6
  Bottom Layer w25: IC3.15 4054.45,2539.45 4054.45,2566.25 4055.01,2566.81 4055.01,2631.53 V4.11
NetIC3_16: IC3.16 V4.2 | length 734.3
  Bottom Layer w25: IC3.16 3615,2200 3615,2709.63 3670.59,2765.22 V4.2
NetIC4_1: IC4.1 R21.1 T7.3 | length 2800.2
  Top Layer w15: R21.1 2330,1235 2413.79,1318.79 2466.21,1318.79 2475,1310 2475,770 2537.52,707.48 IC4.1
  Top Layer w25: R21.1 1765.54,1234.46 1765.54,1171.63 v1(1766.09,1171.09)
  Bottom Layer w25: T7.3 768.13,463.13 768.13,474.18 1131.25,837.3 1165.52,837.3 1499.31,1171.09 v1(1766.09,1171.09)
NetIC4_2: IC4.2 IC8.3 | length 3086.1
  Top Layer w15: IC4.2 2726.21,675.98 2735,684.77 v1(2735,686.99) ; v1(3305,1290) 3415,1400 v1(4585,1400)
  Bottom Layer w15: v1(2735,686.99) 2741.99,686.99 2845,790 3245,790 3305,850 v1(3305,1290) ; v1(4585,1400) 4915,1730 IC8.3
NetIC4_3: IC4.3 IC8.6 | length 3380.3
  Top Layer w15: IC4.3 2789.49,644.49 v1(2835,690) ; v1(3385,1280) 4734.29,1280 5085.69,1631.41 5086.41,1631.41 5213.21,1758.21 5213.21,1798.21 IC8.6
  Bottom Layer w15: v1(2835,690) 2910,765 3310,765 3385,840 v1(3385,1280)
NetIC4_4: IC4.4 IC8.7 | length 3439.2
  Top Layer w15: IC4.4 2876.21,612.99 2885,621.78 v1(2885,624) ; v1(3465,1220) 4709.64,1220 4989.64,1500 5065,1500 5171.41,1606.41 5315,1750 IC8.7
  Bottom Layer w15: v1(2885,624) 2889,624 3005,740 3320.36,740 3465,884.64 v1(3465,1220)
NetIC4_5: IC4.5 R23.1 | length 2120.1
  Top Layer w15: IC4.5 2916.5,581.5 v1(2965,630) ; v1(3575,1322.5) 3582.5,1330 3583.75,1328.75 4158.75,1328.75 R23.1
  Bottom Layer w15: v1(2965,630) 2975,630 3060,715 3371.21,715 3575,918.79 v1(3575,1322.5)
NetIC4_14: IC4.14 R9.1 | length 4068.2
  Top Layer w15: v1(365,1450) 365,300 465,200 2640,200 2719.24,279.24 2719.24,328.25 IC4.14 ; R9.1@506.7,1693.3 R9.1 v1(515,1750)
  Bottom Layer w15: v1(365,1450) 365,1600 v1(515,1750)
NetIC4_15: IC4.15 R7.1 | length 4335.8
  Top Layer w15: R7.1 705,1625 440,1625 315,1500 315,300 465,150 2633.32,150 2750.73,267.41 2750.73,328.25 IC4.15
NetIC4_16: IC4.16 K1.1 R6.1 | length 4123
  Top Layer w15: R6.1 265,300 465,100 K1.1 2637.03,122.03 2647.03,122.03 2783.5,258.5 IC4.16
NetIC4_17: IC4.17 K1.2 | length 270.9
  Top Layer w15: K1.2 2716.79,101.79 2716.79,141.79 2815,240 IC4.17
NetIC4_18: IC4.18 K1.5 R11.1 | length 780.2
  Top Layer w15: IC4.18 2846.5,268.5 K1.5 ; K1.5@3008.93,100 3390.24,100 3450.24,160 R11.1
NetIC4_24: IC4.24 R12.2 | length 690.5
  Top Layer w15: IC4.24 3130.63,424.02 3262.14,292.5 3382.6,292.5 3434.34,240.77 3601,240.77 3625.24,265 R12.2
NetIC4_37: IC4.37 JP1.2 R14.2 | length 798.4
  Top Layer w15: IC4.37 2879.27,771.75 2879.27,814.27 2965,900 JP1.2
  Top Layer w25: R14.2 2765,1250 JP1.2
NetIC4_38: IC4.38 IC9.3 | length 3885.5
  Top Layer w15: IC4.38 2847.77,771.75 2847.77,818.12 2867.26,837.61 2867.26,838.32 2868.5,839.57 2868.5,882.08 2851,899.58 v1(2851,951.56) ; v1(3164.95,960.05) 3165,960.1 3165,1090.1 3234.9,1160 4685,1160 5000,1475 5854.64,1475 6015,1635.36 IC9.3
  Bottom Layer w15: v1(2851,951.56) 2851.95,952.5 3157.4,952.5 v1(3164.95,960.05)
NetIC4_39: IC4.39 IC9.6 | length 4331.6
  Top Layer w15: IC4.39 2815,840 2826,851 v1(2826,856.46) ; v1(3175.05,852.5) 3177.55,850 3624.18,850 3826.33,1052.15 5097.15,1052.15 5445,1400 6081.51,1400 6462.03,1780.52 6462.03,1819.48 6434.48,1847.03 6362.03,1847.03 IC9.6
  Bottom Layer w15: v1(2826,856.46) 2827.99,854.48 3173.07,854.48 v1(3175.05,852.5)
NetIC4_40: IC4.40 IC9.7 | length 4158.5
  Top Layer w15: IC4.40 2783.5,888.68 2794.41,899.59 v1(2794.41,909.06) ; v1(3225.05,899.95) 3614.95,899.95 3792.15,1077.15 5084.14,1077.15 5406.99,1400 5409.64,1400 5434.64,1425 6071.15,1425 6408.79,1762.64 6408.79,1793.79 IC9.7
  Bottom Layer w15: v1(2794.41,909.06) 3215.94,909.06 v1(3225.05,899.95)
NetIC4_41: IC4.41 IC9.4 | length 3964
  Top Layer w15: v1(2722.5,897.25) 2722.5,889.09 2752.01,859.58 IC4.41 ; v1(3235,1100) 3237.15,1102.15 5073.78,1102.15 5421.64,1450 5865,1450 6115,1700 IC9.4
  Bottom Layer w15: v1(2722.5,897.25) 2925.25,1100 v1(3235,1100)
NetIC4_42: IC4.42 R15.2 S1.1 | length 531.5
  Top Layer w15: IC4.42 2720.51,839.13 2680,879.64 2680,965 S1.1
  Top Layer w25: R15.2 S1.1
NetIC4_43: IC4.43 R8.1 | length 804.6
  Top Layer w15: R8.1 2460.36,1360 2530.77,1289.59 2530.77,993.52 2689.02,835.27 IC4.43
NetIC4_44: IC4.44 R18.1 T6.3 | length 1795.6
  Top Layer w15: R18.1 v1(1765,525) ; v1(2555,810) 2595,770 2654.45,770 2654.92,770.47 IC4.44
  Top Layer w25: v1(1675,460) 1677.5,462.5 1762.5,462.5 R18.1
  Bottom Layer w15: v1(1765,525) 2050,810 v1(2555,810)
  Bottom Layer w25: T6.3 1118.13,456.87 1118.13,445.82 1147.12,416.83 1148.17,416.83 1165,400 1615,400 v1(1675,460)
NetIC7_2: IC7.2 R16.2 T5.1 | length 1098.2
  Top Layer w35: T5.1 5121.77,290 5351.77,60 5544.5,60 5565,80.5 IC7.2
NetIC8_1: IC8.1 V5.4 | length 1519.6
  Bottom Layer w25: IC8.1 4715,1927.43 4592.97,2049.45 4592.97,2150.55 4745,2302.57 4745,2926.62 V5.4
NetIC8_2: IC8.2 V5.3 | length 1359.4
  Bottom Layer w25: IC8.2 4815,1876.92 4627.97,2063.95 4627.97,2136.05 4795,2303.08 4795,2807.33 4934.72,2947.05 V5.3
NetIC8_8: IC8.8 V5.10 | length 1197.6
  Top Layer w25: V5.10 5465,2700.23 5465,2512.18 5547.18,2430 v1(5625,2430)
  Bottom Layer w25: IC8.8 5415,1970 5525,2080 5525,2320 5625,2420 v1(5625,2430)
NetIC8_9: IC8.9 V5.9 | length 988.2
  Top Layer w25: V5.9 5396.14,2947.05 5433.82,2909.36 5433.82,2908.57 5575,2767.39 v1(5575,2520)
  Bottom Layer w25: IC8.9 5415,2360 v1(5575,2520)
NetIC8_10: IC8.10 V5.5 | length 1929.6
  Top Layer w25: V5.5 5011.49,3270.96 5080.8,3340.27 5170.53,3430 5325,3430 5575,3180 v1(5575,2860)
  Bottom Layer w25: IC8.10 5315,2332.82 5575,2592.82 v1(5575,2860)
NetIC8_11: IC8.11 V5.6 | length 2370.7
  Top Layer w25: v1(4505,2170) 5145,2170 IC8.11
  Bottom Layer w25: v1(4505,2170) 4695,2360 4695,3100 4975,3380 5091.14,3380 5168.97,3302.17 V5.6
NetIC8_13: IC8.13 V5.8 | length 1871.4
  Top Layer w25: v1(5015,1950) v1(5195,1950)
  Bottom Layer w25: v1(5015,1950) IC8.13 ; v1(5195,1950) 5338.58,1950 5475,2086.42 5475,2347.18 5622.5,2494.68 5622.5,2917.35 5415.64,3124.21 V5.8
NetIC8_14: IC8.14 V5.7 | length 1776.3
  Bottom Layer w25: IC8.14 4862.97,2047.97 4693.45,2047.97 4662.97,2078.45 4662.97,2121.55 4845,2303.58 4845,2776.49 4928.24,2859.73 4982.34,2859.73 5067.73,2945.12 5067.73,3003.29 V5.7
NetIC8_15: IC8.15 V5.11 | length 743.9
  Bottom Layer w25: IC8.15 4815,2109.22 5326.45,2620.66 V5.11
NetIC8_16: IC8.16 V5.2 | length 764.2
  Bottom Layer w25: IC8.16 4895,2280 4895,2701.63 4942.59,2749.22 V5.2
NetIC9_1: IC9.1 V6.4 | length 1498.8
  Bottom Layer w25: IC9.1 5815,1900 5685,2030 5685,2170 5735,2220 5735,2882.62 V6.4
NetIC9_2: IC9.2 V6.3 | length 1334.6
  Bottom Layer w25: IC9.2 5915,1860 5725,2050 5725,2150 5785,2210 5785,2763.33 5968.72,2947.05 V6.3
NetIC9_8: IC9.8 V6.10 | length 1096.5
  Top Layer w25: V6.10 6525,2674.23 6525,2450 v1(6625,2350)
  Bottom Layer w25: IC9.8 6515,1976.92 6625,2086.92 v1(6625,2350)
NetIC9_9: IC9.9 V6.9 | length 957.5
  Top Layer w25: V6.9 6430.14,2947.05 6467.82,2909.36 6467.82,2908.57 6605,2771.39 v1(6605,2510)
  Bottom Layer w25: IC9.9 6515,2420 v1(6605,2510)
NetIC9_10: IC9.10 V6.5 | length 1888.3
  Top Layer w25: V6.5 6045.49,3270.49 6112.68,3337.68 6112.68,3338.15 6194.53,3420 6365,3420 6605,3180 v1(6605,2860)
  Bottom Layer w25: IC9.10 6415,2389.61 6605,2579.61 v1(6605,2860)
NetIC9_11: IC9.11 V6.6 | length 2297.4
  Top Layer w25: v1(5635,2170) 6245,2170 IC9.11
  Bottom Layer w25: v1(5635,2170) 5635,2176.76 5647.5,2189.26 5647.5,2192.5 5685,2230 5685,3050 6015,3380 6125.14,3380 6202.97,3302.17 V6.6
NetIC9_13: IC9.13 V6.8 | length 1659.8
  Bottom Layer w25: IC9.13 6167.03,2047.97 6536.55,2047.97 6575,2086.42 6575,2412.82 6652.5,2490.32 6652.5,2901.06 V6.8
NetIC9_14: IC9.14 V6.7 | length 1748.9
  Bottom Layer w25: IC9.14 5962.97,2047.97 5793.45,2047.97 5762.97,2078.45 5762.97,2121.55 5835,2193.58 5835,2732.49 5962.24,2859.73 6016.34,2859.73 6101.73,2945.12 6101.73,3003.29 V6.7
NetIC9_15: IC9.15 V6.11 | length 717.1
  Bottom Layer w25: IC9.15 6361.01,2546.01 6361.01,2631.53 V6.11
NetIC9_16: IC9.16 V6.2 | length 736.8
  Bottom Layer w25: IC9.16 5885,2170 5885,2678.29 V6.2
NetLA1_1: LA1.1 T3.3 | length 1602.1
  Bottom Layer w25: T3.3 2211.87,1553.13 2211.87,1653.13 2125,1740 2125,2990 2185,3050 LA1.1@2225,3050
NetLA1_2: LA1.2 R3.1 | length 418.5
  Top Layer w25: R3.1 LA1.2@2225,2833.46
NetLA2_1: LA2.1 T8.3 | length 1593.8
  Bottom Layer w25: T8.3 4511.87,1553.13 4511.87,1653.13 4437.67,1727.33 4437.67,2992.67 4495,3050 LA2.1
NetLA2_2: LA2.2 R24.1 | length 423.9
  Top Layer w25: R24.1@4534.5,2410.5 LA2.2@4534.5,2832.96
  Top Layer w35: LA2.2@4534,2833.46 LA2.2@4534.5,2832.96 ; R24.1@4534.5,2410.5 R24.1
NetLED1_1: LED1.1 R12.1 | length 327.5
  Top Layer w15: R12.1 3959.06,135 LED1.1
NetLED2_1: LED2.1 R29.2 | length 839.8
  Top Layer w25: R29.2 v1(710,2415)
  Bottom Layer w25: LED2.1 628.52,2804.47 695.47,2804.47 757,2866 820,2866 874.26,2811.74 874.26,2579.26 v1(710,2415)
NetLED3_1: LED3.1 R30.2 | length 1204.2
  Top Layer w25: R30.2 1743.24,2415 1748.24,2420 v1(1755,2420)
  Bottom Layer w25: LED3.1 1654.06,2801.97 1669.11,2817.03 1672.03,2817.03 1717.23,2862.23 1717.23,2981.54 1759.37,3023.68 1888.32,3023.68 1955,2957 1955,2620 v1(1755,2420)
NetLED4_1: LED4.1 R31.2 | length 1162.9
  Top Layer w25: R31.2 3050,2415 v1(3055,2420)
  Bottom Layer w25: LED4.1 2924.06,2801.97 2987.54,2865.45 2987.54,2972.3 3035.96,3020.73 3142.73,3020.73 3215,2948.46 3215,2580 v1(3055,2420)
NetLED5_1: LED5.1 R32.2 | length 1173.8
  Top Layer w25: R32.2 4050,2415 v1(4055,2420)
  Bottom Layer w25: LED5.1 3964.06,2801.97 4024.54,2862.45 4024.54,2975.3 4069.96,3020.73 4176.73,3020.73 4247.5,2949.96 4247.5,2850.32 4248.2,2849.63 4248.2,2613.2 v1(4055,2420)
NetLED6_1: LED6.1 R33.2 | length 1213.5
  Top Layer w25: R33.2 5330,2415 v1(5335,2420)
  Bottom Layer w25: LED6.1 5234.06,2801.97 5295.54,2863.45 5295.54,2974.3 5341.96,3020.73 5469.63,3020.73 5520.2,2970.16 5520.2,2605.2 v1(5335,2420)
NetLED7_1: LED7.1 R34.2 | length 1237.9
  Top Layer w25: R34.2 6360,2415 v1(6365,2420)
  Bottom Layer w25: LED7.1 6264.06,2801.97 6324.74,2862.66 6324.74,2975.1 6370.37,3020.73 6482.73,3020.73 6554.2,2949.26 6554.2,2609.2 v1(6365,2420)
NetMOD1_1: MOD1.1 R10.1 | length 261.3
  Top Layer w25: MOD1.1 1574.8,734.8 R10.1
NetMOD1_4: MOD1.4 MOD1.19 | length 712
  Top Layer w25: MOD1.19 664.97,883.65 723.85,883.65 v1(725,882.5) ; v1(1120.2,884.8) MOD1.4
  Bottom Layer w25: v1(725,882.5) 797.5,810 1045.39,810 v1(1120.2,884.8)
NetMOD1_7: MOD1.7 R20.1 | length 261.3
  Top Layer w25: MOD1.7 1313.92,1234.9 1574.9,1234.9 R20.1
NetMOD1_17: MOD1.17 R28.1 | length 180.6
  Top Layer w25: R28.1 529.76,1060 534,1055.77 534,1054.64 598.62,990.02 658.6,990.02 MOD1.17
NetMOD1_18: MOD1.18 R27.1 | length 718.1
  Top Layer w25: R27.1 515,1430 455,1370 455,1030 550.2,934.8 MOD1.18
NetMOD1_21: MOD1.21 R22.1 T7.1 | length 1070.8
  Top Layer w25: v1(515,510) R22.1 500.24,445 496,449.23 496,455.1 445,506.1 445,727.69 502.12,784.8 MOD1.21
  Bottom Layer w25: v1(515,510) 653.95,510 763.95,400 843.52,400 858.17,414.64 858.17,453.17 T7.1
NetMOD1_22: MOD1.22 R19.1 T6.1 | length 1233.5
  Top Layer w25: MOD1.22 951.25,734.8 1208.17,477.88 1208.17,466.83 T6.1 1425,670 R19.1
NetP1_1: P1.1 P1.3 R13.1 | length 878.7
  Top Layer w35: P1.3 6066.57,398.43 P1.1 6315,942.13 R13.1
NetR1_1: R1.1 V1.1 | length 231.8
  Top Layer w25: R1.1 365,2580 400.55,2615.55 V1.1@400.55,2632.09
NetR2_1: R2.1 V2.1 | length 225.8
  Top Layer w25: R2.1 1415,2569.32 1428.9,2583.22 V2.1@1428.9,2635.04
NetR4_1: R4.1 V3.1 | length 221.5
  Top Layer w25: V3.1 2704.93,2631.53 2704.93,2578.23 2715,2568.16 R4.1
NetR5_1: R5.1 V4.1 | length 227.2
  Top Layer w25: R5.1 3715,2564.32 3739.49,2588.81 V4.1
NetR6_2: R6.2 T1.2 | length 185
  Top Layer w25: R6.2 T1.2
NetR7_2: R7.2 T2.2 | length 185
  Top Layer w25: R7.2 T2.2
NetR8_2: R8.2 T3.2 | length 208.6
  Top Layer w15: R8.2 R8.2@2210,1374.76
  Top Layer w25: T3.2 2165,1419.76 R8.2@2210,1374.76
NetR9_2: R9.2 T4.2 | length 185
  Top Layer w25: R9.2 T4.2
NetR23_2: R23.2 T8.2 | length 384.5
  Top Layer w25: R23.2 4179.76,1465 4307.93,1593.17 4444.99,1593.17 4461.87,1576.28 4461.87,1553.13 T8.2
NetR25_1: R25.1 V5.1 | length 217.6
  Top Layer w25: R25.1 4965,2562.74 4990.7,2588.44 V5.1@4990.7,2621.93
NetR26_1: R26.1 V6.1 | length 250
  Top Layer w25: R26.1 5965,2552.6 V6.1@6044.49,2632.09
NetT1_3: T1.3 V1.2 | length 826.5
  Bottom Layer w25: T1.3 311.87,2003.13 311.87,2073.13 255,2130 255,2690 331.65,2766.65 V1.2@331.65,2769.88
NetT2_3: T2.3 V1.10 | length 900.9
  Bottom Layer w25: V1.10@784.41,2769.88 784.41,2726.61 805.36,2705.66 805.36,2577.54 662.5,2434.68 662.5,2295.8 815,2143.3 T2.3
NetT4_3: T4.3 V1.11 | length 694.4
  Bottom Layer w25: T4.3 565,2460 715.51,2610.51 V1.11@715.51,2632.09
pads on no net: IC4.12 IC4.13 IC4.23 IC4.25 IC4.26 IC4.27 IC4.33 IC4.34 LA1.3 LA2.3 MOD1. MOD1.2 MOD1.8 MOD1.10 MOD1.11 MOD1.12 MOD1.13 MOD1.14 MOD1.15 MOD1.16 V1.0 V1.3 V1.4 V1.5 V1.6 V1.7 V1.8 V1.9 V1.12 V2.0 V2.12 V3.0 V3.12 V4.0 V4.12 V5.0 V5.12 V6.0 V6.12

## Polygon pours and split planes (outlines as drawn)
+5V on Top Layer "+5V" (solid, pour order 1): 0,0 0,3700 6761,3700 6761,0
GND on Bottom Layer "GND" (solid, pour order 2): 0,0 0,3700 6761,3700 6761,0

## Silkscreen, mask and mechanical layers (free items; w line width, h text height)
Top Overlay:
  circle w10: c4015,130 r3.35
  text "GND" at 6455,780 h60
  text "9-15V" at 6325,160 h60
Bottom Overlay:
  circle w10: c6264.55,2847.83 r0.96
  circle w10: c5234.6,2846.4 r0.48
  circle w10: c3965.18,2847.9 r1.07
  circle w10: c2925,2850 r3.51
  circle w10: c-1635,2860 r3.51
  circle w10: c625,2850 r3.51
  circle w10: c1655,2850 r3.51
  circle w10: c2265,2770 r5.1
  circle w10: c4585,2770 r5.1

## Text inside footprints (layer, text, board x,y; h text height)
LED1: Mechanical 1 "K" at 3959,256 h10 r90
LED2: Mechanical 1 "K" at 512.33,2826.66 h10
LED3: Mechanical 1 "K" at 1540.67,2816.33 h10
LED4: Mechanical 1 "K" at 2810.67,2816.33 h10
LED5: Mechanical 1 "K" at 3849,2806 h10
LED6: Mechanical 1 "K" at 5120.67,2816.33 h10
LED7: Mechanical 1 "K" at 6150.67,2816.33 h10